# Altium PCB EEU_SSSHI.PcbDoc
Units mil, origin at the board's own origin, x right, y up, seen from the top; angles counter-clockwise.
Board outline 985.52 x 985.8 mil, 2 copper layers (Top Layer, Bottom Layer); 15 components, 16 nets, 74 pads, 16 vias.
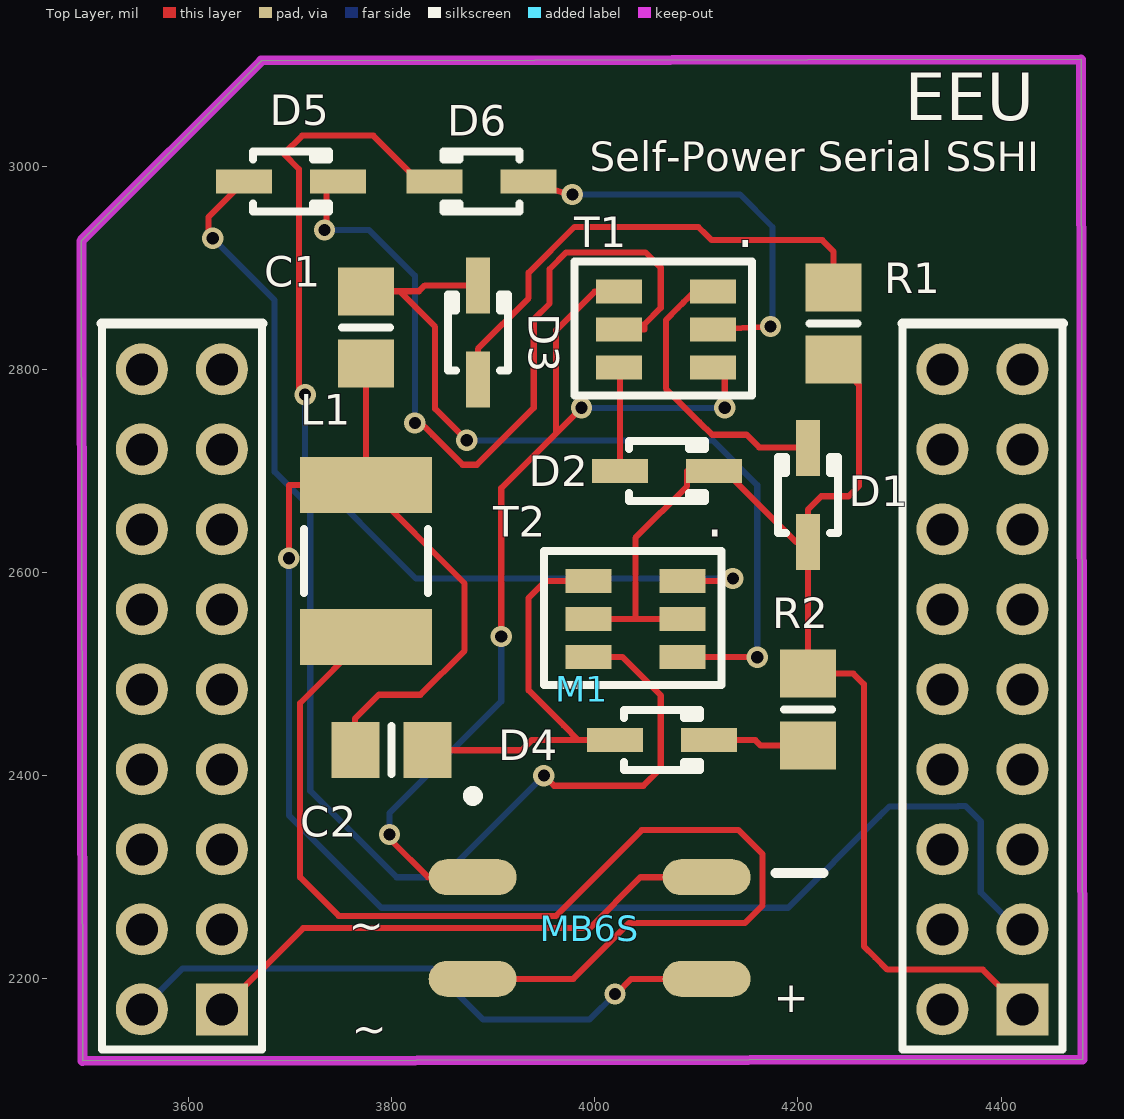
[diagram p0: Top Layer view]
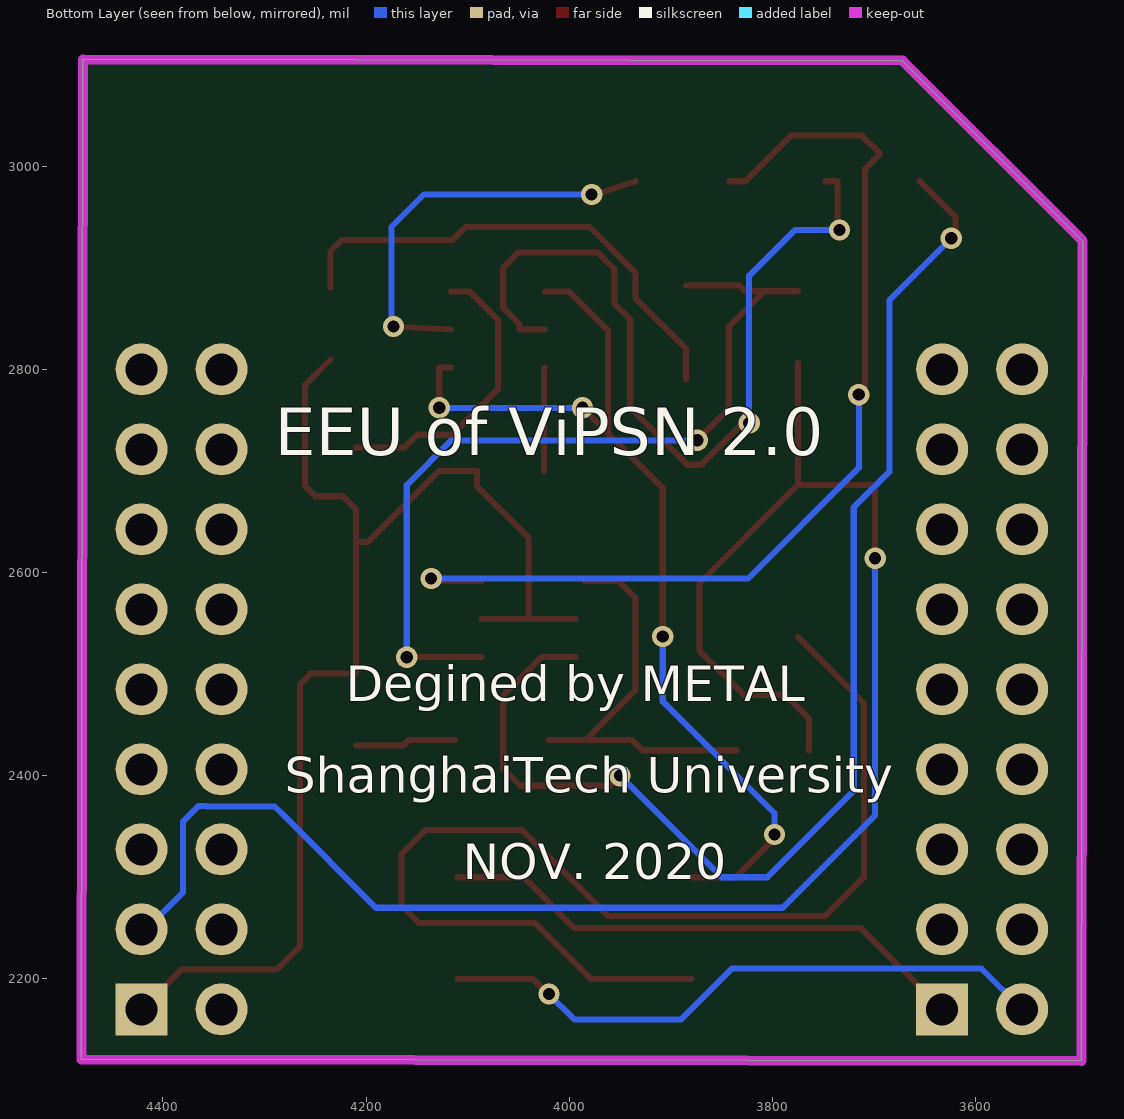
[diagram p1: Bottom Layer view, seen from below]

## Layer stack, top to bottom
Top Layer: signal copper 1.4
Dielectric: dielectric 12.6, FR-4, Dk 4.8
Bottom Layer: signal copper 1.4

## Board outline
3496,2119.2 3494.73,2926.29 3671.89,3103.45 3671.61,3103.73 4478.7,3105 4480.25,2120.75

## Design rules (kind name [scope] priority, off if disabled: settings)
Clearance [All] p1: gap=6
PolygonConnect [All] p1: connectstyle=Relief reliefconductorwidth=10 reliefentries=4 polygonreliefangle="90 Angle"
RoutingVias [All] p1: holewidth=15 width=25 viastyle="Through Hole" minholewidth=15 minwidth=25 maxholewidth=15 maxwidth=25
SilkscreenOverComponentPads SilkToSolderMaskClearance [IsPad] p1: minsilkscreentomaskgap=10
SolderMaskExpansion [All] p1: expansion=4
Width [All] p1: maxlimit=10 minlimit=6 preferedwidth=10
27 further rules are at their usual default settings.

## Components (designator, comment, footprint, x,y, rotation, side; value= is the part's Value field where it differs from the comment)
C1 "CAP" 6-0805_N 3775,2841.3 r90 top
C2 "CAP" 6-0805_N 3800,2425 r0 top
D1 "NRS0240H" SOD323 4210,2630 r90 top
D2 "NRS0240H" SOD323 4025,2700 r0 top
D3 "NRS0240H" SOD323 3885,2790 r90 top
D4 "NRS0240H" SOD323 4020,2435 r0 top
D5 "NRS0240H" SOD323 3655,2985 r0 top
D6 "NRS0240H" SOD323 3935,2985 r180 top
L1 "1mH" 1812 3775,2611.3 r270 top
M1 "MHDR2X18" MODULE9X4 4420,2800 r180 top
MB6S "Header 2X2" MB6S 3995,2250 r0 top
R1 "Res1" 6-0805_N 4235,2845 r270 top
R2 "Res1" 6-0805_N 4210,2465 r90 top
T1 "XN4601" XN4601 4115,2800 r180 top
T2 "XN4601" XN4601 4085,2515 r180 top

## Footprints (in the part's own frame and the unit in brackets; to place one, negate y for a bottom-side part, rotate by r counter-clockwise, add the part's x,y. Pads: shape width x height; smd on the part's side, far side on the other; paste and mask are expansions set on the pad)
6-0805_N [mm] "Chip Resistor, Body 2.0x1.2mm, IPC Medium Density"
  rect 1.2x1.4 smd: 1(-0.9,0) 2(0.9,0)
  silkscreen extent 0,-0.6 0,0.6, body extent -1.07,-0.7 1.07,0.7, height 0.7
1812 [mm] "Chip Capacitor, Body 4.5x3.2mm, IPC High Density"
  rect 1.4x3.3 smd: 1(-1.9,0) 2(1.9,0)
  silkscreen extent -0.8,-1.55 0.8,1.55, body extent -2.4,-1.7 2.4,1.7, height 1.4
MB6S [mm] "SOP127P600-8N"
  oval 2.2x0.9 smd: 1(-2.925,1.27) 2(2.925,1.27) 3(-2.925,-1.27) 4(2.925,-1.27)
  silkscreen extent -3.04,1.37 5.84,3.43, body extent -2.05,-2.47 2.05,2.47, height 2.9
MODULE9X4 [mm]
  rect 1.3x1.3 hole 0.8: 1(-0.025,16.002) 36(19.99,16.002)
  round 1.3 hole 0.8: 2(21.99,16.002) 3(-0.025,14.002) 4(21.99,14.002) 5(-0.025,12.002) 6(21.99,12.002) 7(-0.025,10.002) 8(21.99,10.002) 9(-0.025,8.002) 10(21.99,8.002) 11(-0.025,6.002) 12(21.99,6.002) 13(-0.025,4.002) 14(21.99,4.002) 15(-0.025,2.002) 16(21.99,2.002) 17(-0.025,0.002) 18(21.99,0.002) 19(1.975,0.002) 20(19.99,0.002) 21(1.975,2.002) 22(19.99,2.002) 23(1.975,4.002) 24(19.99,4.002) 25(1.975,6.002) 26(19.99,6.002) 27(1.975,8.002) 28(19.99,8.002) 29(1.975,10.002) 30(19.99,10.002) 31(1.975,12.002) 32(19.99,12.002) 33(1.975,14.002) 34(19.99,14.002) 35(1.975,16.002)
  silkscreen extent -1.04,-1.14 22.99,17
SOD323 [mm] "0805"
  rect 1.4x0.6 smd: 1(0,0) 2(2.35,0)
  silkscreen extent 0.22,-0.75 2.13,0.75, body extent -0.17,-0.67 2.43,0.63, height 1
XN4601 [mm]
  rect 1.15x0.6 smd: 1(-0.032,-1.941) 2(-0.032,-0.991) 3(-0.032,-0.041) 4(2.318,-0.041) 5(2.318,-0.991) 6(2.318,-1.941)
  silkscreen extent -1.02,-2.69 3.43,0.66, body extent 0.27,-2.54 2.02,0.56, height 1.3

## Part data
C1 C2: "Capacitor"
D1 D2 D3 D4 D5 D6: library part "Diode 1N4004", "1 Amp General Purpose Rectifier"
L1: library part INDUCTOR
M1: "Header, 18-Pin, Dual row"
MB6S: "Header, 2-Pin, Dual row"
R1 R2: "Resistor"
T1 T2: "Composite Transistors"

## Via types
v1: diameter 21, hole 12, Top Layer to Bottom Layer, 16 vias

## Nets (pads, with @x,y where several pads share a name; then routed paths per layer and width w, separated by ;. In a path a pad name is that pad's centre, name@x,y a point inside that pad or via, vN(x,y) a via of type N, cw(c..) or ccw(c..) an arc to the next point about the centre after c; other vN are vias at no path point)
AC1: L1.2 MB6S.3 | length 1144.7
  Top Layer w6: L1.2 3710,2471.5 3710,2300 3748,2262 3962,2262 4046.34,2346.34 4065,2346.34 4141.66,2346.34 4165,2323 4165,2272 4148,2255 4034,2255 3979,2200 MB6S.3
AC2: MB6S.1 T1.3 T1.6 | length 984.8
  Top Layer w6: v1@3800,2336 3836,2300 MB6S.1 ; v1(3908,2537) 3908,2683 3962.02,2737.02 ; 3962.02,2800 3962.02,2779.46 ; v1(3987,2762) 3975,2750 3962.02,2737.02 ; T1.6 4000,2876.4 3962.02,2838.42 3962.02,2779.46 ; T1.3 4128,2801.6 v1(4128,2762) ; 3962.02,2737.02 3962.02,2779.46
  Bottom Layer w6: v1(3798,2342) 3798,2363 3908,2473 v1(3908,2537) ; v1(3987,2762) 4095,2762 v1(4128,2762)
GND: M1.36 MB6S.2 | length 531
  Top Layer w6: M1.36 3712.99,2250 3995,2250 4045,2300 MB6S.2
NetC1_2: C1.2 D3.2 T2.3 | length 833.8
  Top Layer w6: C1.2 3808,2876.73 ; v1(3874,2730) 3843,2761 3843,2841.73 3808,2876.73 ; D3.2 3832.79,2882.52 3827,2876.73 3808,2876.73 ; T2.3 v1(4160,2516.6)
  Bottom Layer w6: v1(3874,2730) 4116,2730 4160,2686 v1(4160,2516.6)
NetC2_2: C2.2 D4.1 T2.6 | length 405.8
  Top Layer w6: C2.2 3928,2425 3938,2435 3984,2435 ; T2.6@3985,2591.4 3951.4,2591.4 3935,2575 3935,2484 3969.5,2449.5 3984,2435 ; D4.1 3984,2435
NetD1_2: D1.2 T1.1 | length 297.8
  Top Layer w6: 4087.66,2866.07 4082,2860.4 ; T1.1 4098,2876.4 4082,2860.4 ; D1.2 4210,2723 4162,2723 4149.5,2735.5 4115.5,2735.5 4103,2748 4070,2781 4070,2848.4 4082,2860.4
NetD2_1: D2.1 T1.4 | length 102.1
  Top Layer w6: T1.4 4025,2800.34 D2.1
NetD3_1: D3.1 R1.1 | length 501.7
  Top Layer w6: D3.1 3885,2820 3935,2870 3935,2895 3980,2940 4102,2940 4115,2927 ; 4106.64,2935.36 4115,2927 ; R1.1 4235,2916 4224,2927 4115,2927
NetD4_2: D4.2 R2.1 | length 99.7
  Top Layer w6: D4.2 4158,2435 4163.43,2429.57 R2.1
NetD5_1: D5.1 T2.4 | length 1245.9
  Top Layer w6: v1@3620,2929 3620,2950 D5.1 ; v1(3950,2400) 3960,2390 4048,2390 4065,2407 4065,2479 4027.4,2516.6 T2.4
  Bottom Layer w6: v1(3624,2929) 3649,2904 3685,2868 3685,2730 3685,2699 3720,2664 3720,2480 3720,2385 3805,2300 3850,2300 v1(3950,2400)
NetD5_2: D5.2 T1.5 | length 829.6
  Top Layer w6: v1(3734,2937) 3736,2939 3736,2985 D5.2 ; v1@3824,2752 3840.5,2735.5 3870,2706 3884,2706 3940,2762 3940,2849 3955.5,2864.5 3955.5,2898.53 3971.97,2915 4050,2915 4065,2900 4065,2860.37 4049,2844.37 4049,2839 T1.5
  Bottom Layer w6: v1(3734,2937) 3778,2937 3823,2892 v1(3823,2747)
NetD6_1: D6.1 T1.2 | length 413.3
  Top Layer w6: D6.1 v1@3980,2970 ; T1.2 v1(4173,2842)
  Bottom Layer w6: v1(3978,2972) 4143,2972 4175,2940 4175,2844 v1(4173,2842)
NetD6_2: D6.2 T2.1 | length 1009.2
  Top Layer w6: v1(3715,2775) 3708.96,2781.04 3708.96,2997.04 3694,3012 3712,3030 3782,3030 3827,2985 D6.2 ; T2.1 4133.4,2591.4 v1(4136,2594)
  Bottom Layer w6: v1(3715,2775) 3715,2703 3824,2594 v1(4136,2594)
PZ1: C1.1 C2.1 L1.1 M1.3 | length 1816.8
  Top Layer w6: v1@3699,2615 3699,2686.1 L1.1 ; C2.1 3764,2425 3764,2456 3787.56,2479.56 3828.46,2479.56 3872,2523.1 3872,2589.1 L1.1 ; C1.1 L1.1
  Bottom Layer w6: 3699,2560 3699,2526 ; v1(3699,2614) 3699,2526 ; M1.3 4416.26,2248.74 4380,2285 4380,2355 4365,2370 4357.79,2370 4357.42,2369.63 4290,2369.63 4280.19,2359.82 4190.37,2270 3790,2270 3699,2361 3699,2526
PZ2: D1.1 D2.2 M1.1 R1.2 R2.2 T2.2 T2.5 | length 1299.7
  Top Layer w6: T2.5 4040,2554 ; T2.2 4040,2554 ; R1.2 4260,2784.57 4260,2685 4250,2675 4223,2675 4219,2671 4210,2662 D1.1 ; 4325,2209 4288,2209 ; M1.1 4382,2209 4288,2209 ; 4040,2554 4040,2634 4091,2685 4091,2700 D2.2 4128,2700 4198,2630 D1.1 ; D1.1 R2.2 4254.57,2500.43 4265,2490 4265,2232 4276,2221 4288,2209
VSTO: M1.2 MB6S.4 | length 625.4
  Top Layer w6: M1.2 M1.2@3554.25,2184.25 ; v1(4020,2185) 4020,2184 4020.5,2184.5 4036,2200 MB6S.4
  Bottom Layer w6: M1.2 3594.25,2210 3840,2210 3890,2160 3995,2160 v1(4020,2185)
pads on no net: M1.4 M1.5 M1.6 M1.7 M1.8 M1.9 M1.10 M1.11 M1.12 M1.13 M1.14 M1.15 M1.16 M1.17 M1.18 M1.19 M1.20 M1.21 M1.22 M1.23 M1.24 M1.25 M1.26 M1.27 M1.28 M1.29 M1.30 M1.31 M1.32 M1.33 M1.34 M1.35

## Keep-outs
Keep-Out Layer:
  lines w10: 3671.61,3103.73 4478.7,3105 4480.25,2120.75 3496,2119.2 3494.73,2926.29 3671.89,3103.45

## Silkscreen, mask and mechanical layers (free items; w line width, h text height)
Top Overlay:
  text "EEU" at 4305,3030 h80
  text "Self-Power Serial SSHI" at 3995,2985 h50
Bottom Overlay:
  text "EEU of ViPSN 2.0" at 4290,2700 h80
  text "Degined by METAL" at 4220,2461.3 h60
  text "ShanghaiTech University" at 4280,2371.3 h60
  text "NOV. 2020" at 4105,2286.3 h60

## Text inside footprints (layer, text, board x,y; h text height)
MB6S: Top Overlay "~" at 3761,2136 h30; Top Overlay "~" at 3758,2238 h30; Top Overlay "+" at 4176,2167 h30